# EAGLE board Angelo Dual Filter PANEL v1.1 (EAGLE 7.7.0)
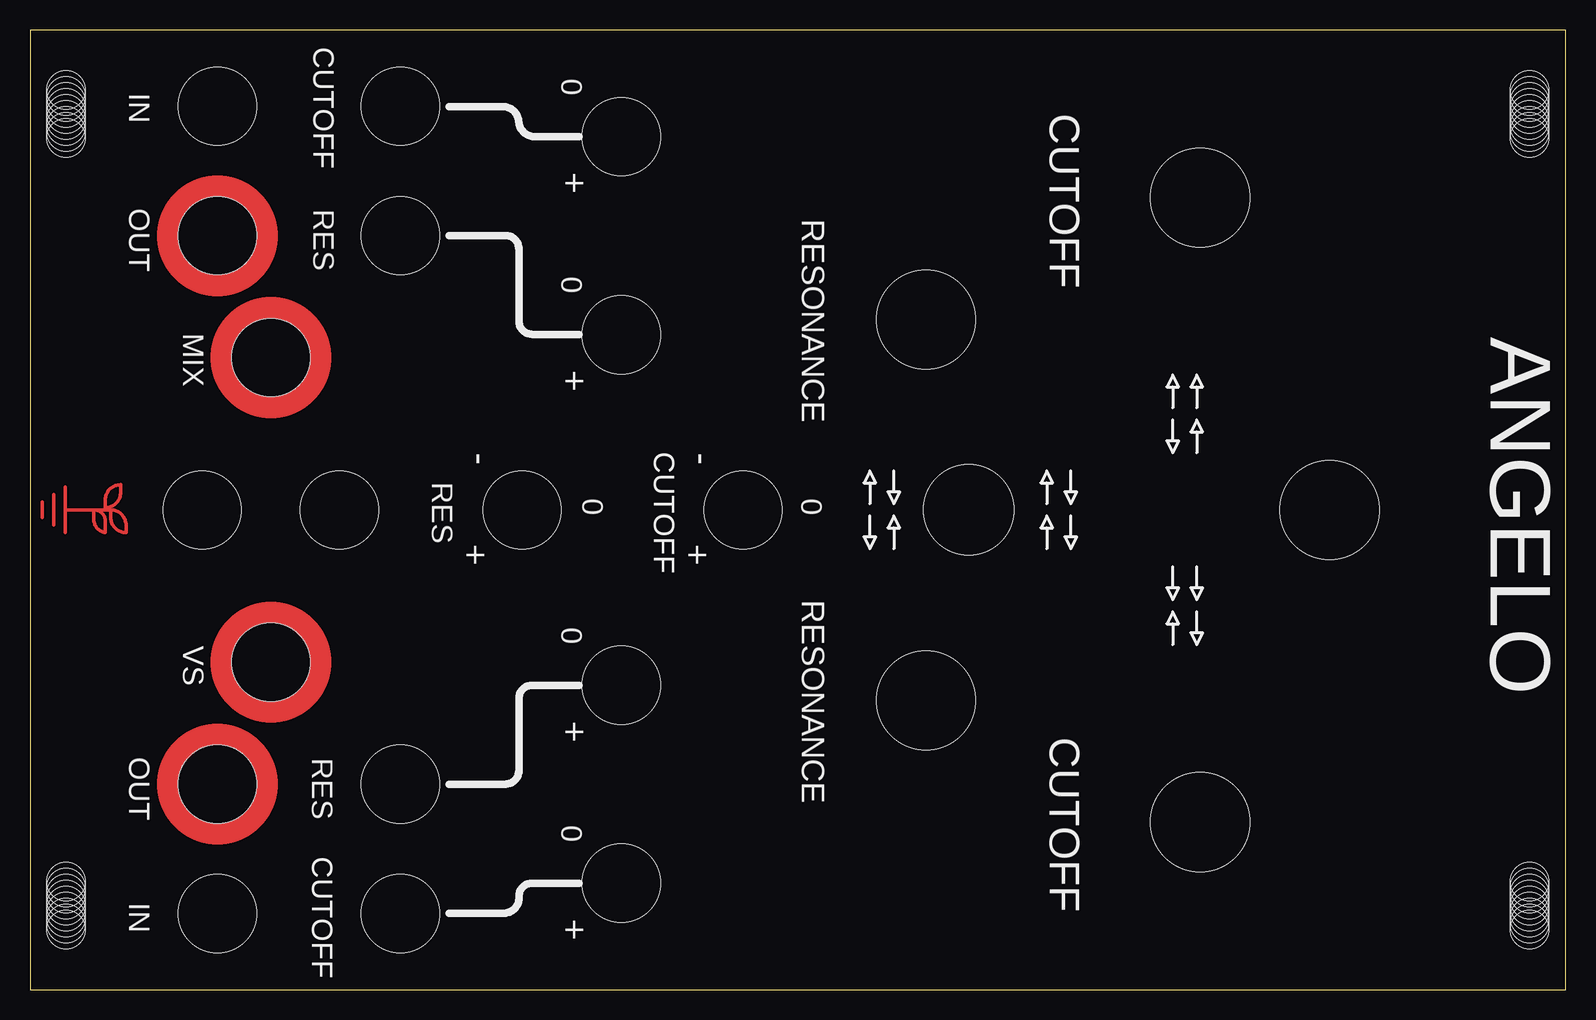
[diagram p0: board, top side]
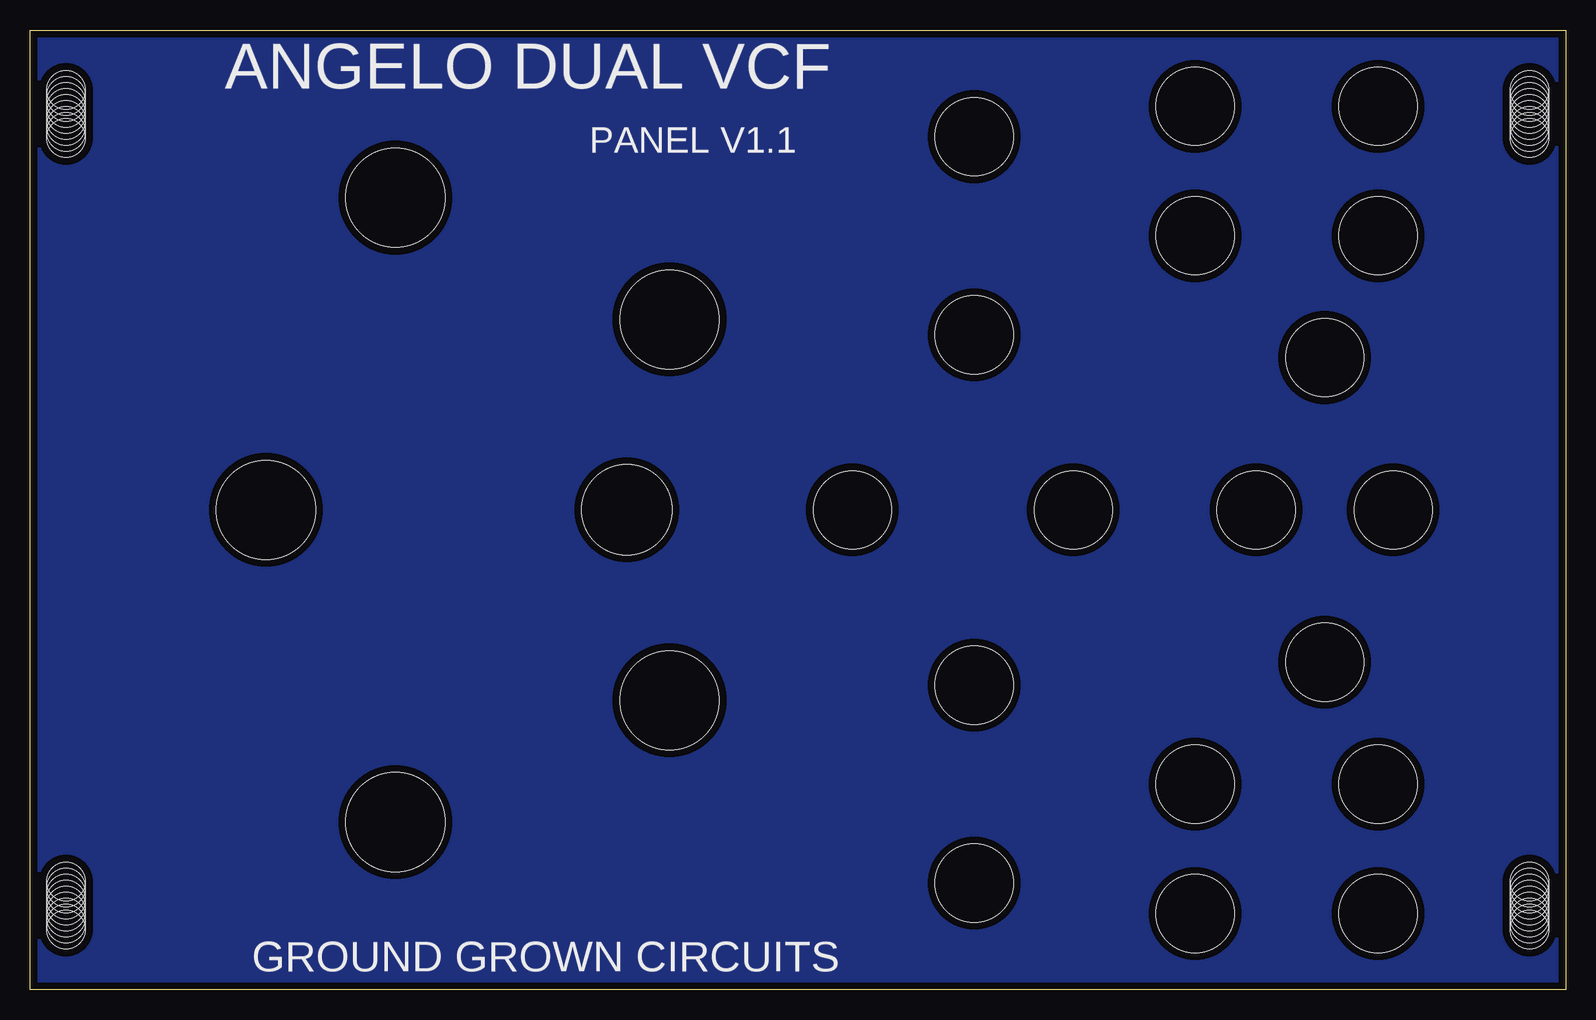
[diagram p1: board, bottom side, seen from below]

Size 128 x 80 mm. Coordinates in mm from the lower left corner, seen from the top.
Outline: 0,0 128,0 128,80 0,80 0,0
Copper layers (1*16): Top 0.035mm / dielectric 1.5mm / Bottom 0.035mm
Design rules "SparkFun": minimum track width 8mil, minimum drill 20mil, track to track 8mil, track to pad 8mil, pad to pad 8mil, via to via 8mil, smd to smd 8mil, copper to edge 8mil, drill to drill 8mil, minimum pad ring 12mil, minimum via ring 10mil, stop-mask expansion 4mil, vias tented up to drill 20mil, thermal gap 10mil

## Footprints (pad centres in the part's own frame; a part is rotated, then mirrored left to right if it is on the bottom)
JACK_DRILL = hole 6.5: 0,0
JACK_DRILL_COPPER_SM = hole 6.5: 0,0
MOUNT_DRILL = hole 3.2: 3,9; 3,8.5; 3,8; 3,7.5; 3,7; 3,6.5; 3,6; 3,5.5; 3,5
SWITCH_DRILL = hole 7.5: 0,0
POT_DRILL = hole 8.25: 0,0

## Placement (x,y rotation side)
1_FCV  [JACK_DRILL]  30.87,73.64 90 top
1_FCVA  B100K  [JACK_DRILL]  49.28,71.1 180 top
1_RCV  [JACK_DRILL]  30.87,62.84 90 top
1_RCVA  [JACK_DRILL]  49.28,54.59 180 top
2_FCV  [JACK_DRILL]  30.87,6.33 90 top
2_FCVA  B100K  [JACK_DRILL]  49.28,8.87 180 top
2_RCV  [JACK_DRILL]  30.87,17.12 90 top
2_RCVA  [JACK_DRILL]  49.28,25.38 180 top
COMP  [JACK_DRILL_COPPER_SM]  20.07,27.29 270 top
E$1  [MOUNT_DRILL]  0,0 0 top
E$2  [MOUNT_DRILL]  128,80 180 top
E$3  [MOUNT_DRILL]  128,0 0 bottom
E$4  [MOUNT_DRILL]  0,80 180 bottom
E$5  [SWITCH_DRILL]  78.25,40 0 top
E$6  [LOGO_SMALL_COPPER]  3,40 270 top
F_1  B100K  [POT_DRILL]  97.55,66.02 180 top
F_2  B100K  [POT_DRILL]  97.55,13.95 180 top
F_3  B100K  [POT_DRILL]  108.34,39.98 180 top
FCV  [JACK_DRILL]  25.79,39.98 180 top
FCVA  B100K  [JACK_DRILL]  59.45,39.98 180 top
IN1  [JACK_DRILL]  15.63,73.64 90 top
IN2  [JACK_DRILL]  15.63,6.33 90 top
MIX  [JACK_DRILL_COPPER_SM]  20.07,52.69 270 top
OUT1  [JACK_DRILL_COPPER_SM]  15.63,62.84 90 top
OUT2  [JACK_DRILL_COPPER_SM]  15.63,17.12 90 top
RCV  [JACK_DRILL]  14.36,39.98 180 top
RCVA  B100K  [JACK_DRILL]  41.03,39.98 180 top
RES_1  B100K  [POT_DRILL]  74.69,55.86 180 top
RES_2  B100K  [POT_DRILL]  74.69,24.11 180 top

## Library data of the parts
1_FCV 1_RCV 2_FCV 2_RCV COMP E$1-E$6 FCV IN1 IN2 MIX OUT1 OUT2 RCV = GroundGrownCircuits
1_FCVA 1_RCVA 2_FCVA 2_RCVA F_1-F_3 FCVA RCVA RES_1 RES_2 = GroundGrownCircuits; PROD_ID: RES-09177

## Tracks (layer width: path | path; a pad name or v marks a point on that pad's centre or on a via)
S$1
  pour Bottom (isolate 0.61): 0,80 128,80 128,0 0,0

## Text on the board
tPlace: 0 | IN | CUTOFF | + | CUTOFF | OUT | RES | 0 | RESONANCE | MIX | + | - | - | RES | 0 | CUTOFF | 0 | ANGELO | + | + | 0 | VS | RESONANCE | + | OUT | RES | CUTOFF | 0 | IN | CUTOFF | +
bPlace: ANGELO DUAL VCF | PANEL V1.1 | GROUND GROWN CIRCUITS